# EAGLE board Brakeout board - wire connection (EAGLE 9.6.2)
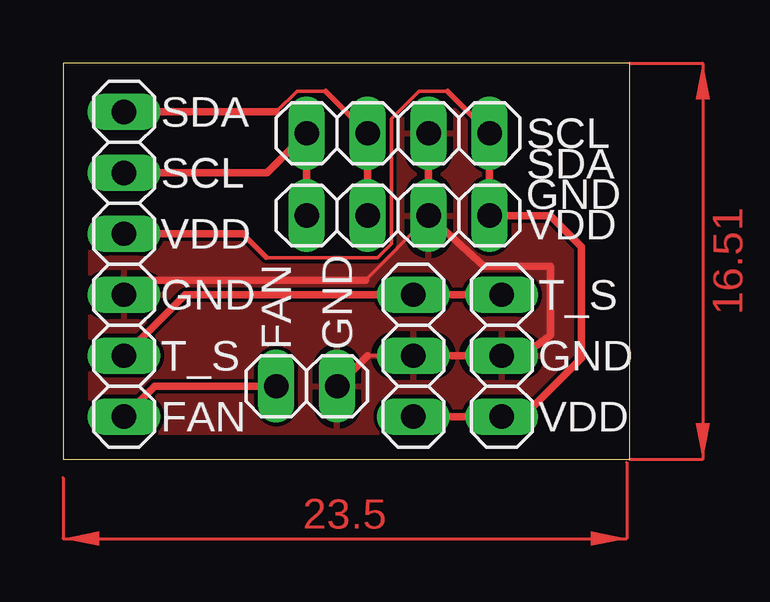
[diagram p0: board, top side]
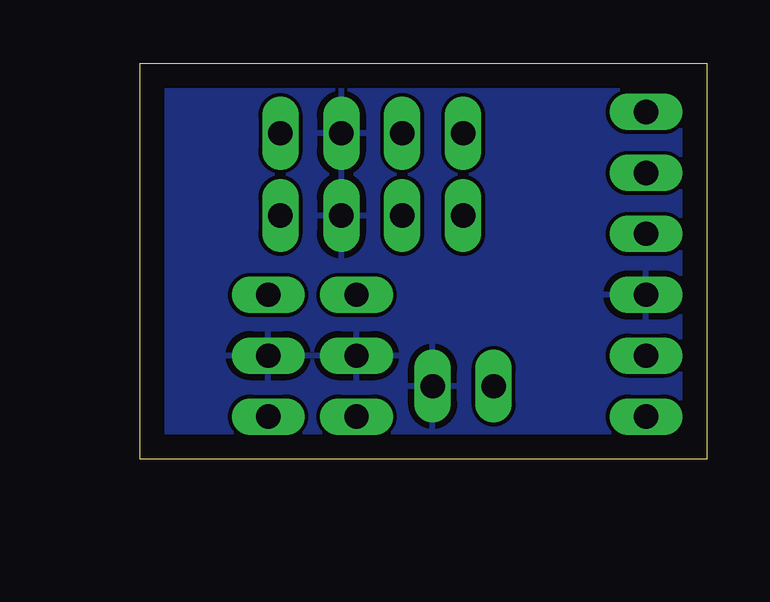
[diagram p1: board, bottom side, seen from below]

Size 23.62 x 16.51 mm. Coordinates in mm from the lower left corner, seen from the top.
Outline: 0,0 23.62,0 23.62,16.51 0,16.51 0,0
Copper layers (1*16): Top 0.035mm / dielectric 1.5mm / Bottom 0.035mm
Design rules "default": minimum track width 6mil, minimum drill 0.35mm, track to track 6mil, track to pad 6mil, pad to pad 6mil, via to via 6mil, smd to smd 6mil, copper to edge 40mil, drill to drill 6mil, minimum pad ring 10mil, minimum via ring 8mil, stop-mask expansion 4mil, vias tented up to drill 0mil, thermal gap 10mil

## Footprints (pad centres in the part's own frame; a part is rotated, then mirrored left to right if it is on the bottom)
1X03 = drill 1.016 long: 1 -2.54,0; 2 0,0; 3 2.54,0
1X02 = drill 1.016 long: 1 -1.27,0; 2 1.27,0
1X04 = drill 1.016 long: 1 -3.81,0; 2 -1.27,0; 3 1.27,0; 4 3.81,0
1X06 = drill 1.016 long: 1 -6.35,0; 2 -3.81,0; 3 -1.27,0; 4 1.27,0; 5 3.81,0; 6 6.35,0

## Placement (x,y rotation side)
DS18B20_1  [1X03]  18.29,4.32 90 top
DS18B20_2  [1X03]  14.61,4.32 90 top
FAN  [1X02]  10.16,3.05 0 top
I2C_RES  [1X04]  13.97,13.59 180 top
OUTPUT  [1X06]  2.54,8.13 90 top
VEML7700  [1X04]  13.97,10.16 180 top

## Library data of the parts
DS18B20_1 = pinhead; DS18B20_SIGNAL: T_S; GND: GND; VDD: VDD
DS18B20_2 VEML7700 = pinhead
FAN = pinhead; GND: GND; VDD_FAN: FAN
I2C_RES = pinhead; GND: GND; SCL: SCL; SDA: SDA; VDD: VDD
OUTPUT = pinhead; DS18B20_SIG: T_S; GND: GND; SCL: SCL; SDA: SDA; VDD: VDD; VDD_FAN: FAN

## Nets
DS18B_SIG: DS18B20_1.3 DS18B20_2.3 OUTPUT.2
GND: DS18B20_1.2 DS18B20_2.2 FAN.2 I2C_RES.2 OUTPUT.3 VEML7700.2
SCL: I2C_RES.4 OUTPUT.5 VEML7700.4
SDA: I2C_RES.3 OUTPUT.6 VEML7700.3
SENSE_VDD33: DS18B20_1.1 DS18B20_2.1 I2C_RES.1 OUTPUT.4 VEML7700.1
VDD_FAN: FAN.1 OUTPUT.1

## Tracks (layer width: path | path; a pad name or v marks a point on that pad's centre or on a via)
DS18B_SIG
  Top 0.305: OUTPUT.2 5.08,6.86 DS18B20_2.3 DS18B20_1.3
GND
  Top 0.152: 12.6,7.47 15.24,10.11 VEML7700.2 | 12.7,4.32 DS18B20_2.2
  Top 0.305: I2C_RES.2 VEML7700.2 17.55,8.05 20.32,8.05 20.32,5.18 19.18,4.32 DS18B20_1.2 DS18B20_2.2 | OUTPUT.3 3.15,7.47 12.6,7.47 | FAN.2 12.7,4.32
  pour Top: 0,-0.13 0,16.38 23.5,16.38 23.5,-0.13
  pour Bottom: 0,-0.13 0,16.38 23.5,16.38 23.5,-0.13
SCL
  Top 0.305: OUTPUT.5 8.51,11.94 I2C_RES.4 VEML7700.4
SDA
  Top 0.152: 8.89,14.48 9.75,15.34 10.95,15.34
  Top 0.2: 10.95,15.34 I2C_RES.3
  Top 0.305: OUTPUT.6 8.89,14.48 | I2C_RES.3 VEML7700.3
SENSE_VDD33
  Top 0.152: 8.48,8.41 13.11,8.41 13.69,8.99 13.69,14.2 14.25,14.76 14.83,15.34 16.03,15.34
  Top 0.2: 16.03,15.34 I2C_RES.1
  Top 0.203: 7.49,9.4 8.48,8.41
  Top 0.305: I2C_RES.1 VEML7700.1 20.32,10.16 21.61,8.87 21.61,4.21 19.18,1.78 DS18B20_1.1 DS18B20_2.1 | OUTPUT.4 7.49,9.4
VDD_FAN
  Top 0.305: FAN.1 3.81,3.05 OUTPUT.1
(copper drawn outside any net)
  shapes: Top area x2